# EAGLE board board comp 12-10-12 (EAGLE 6.3), part 1 of 2
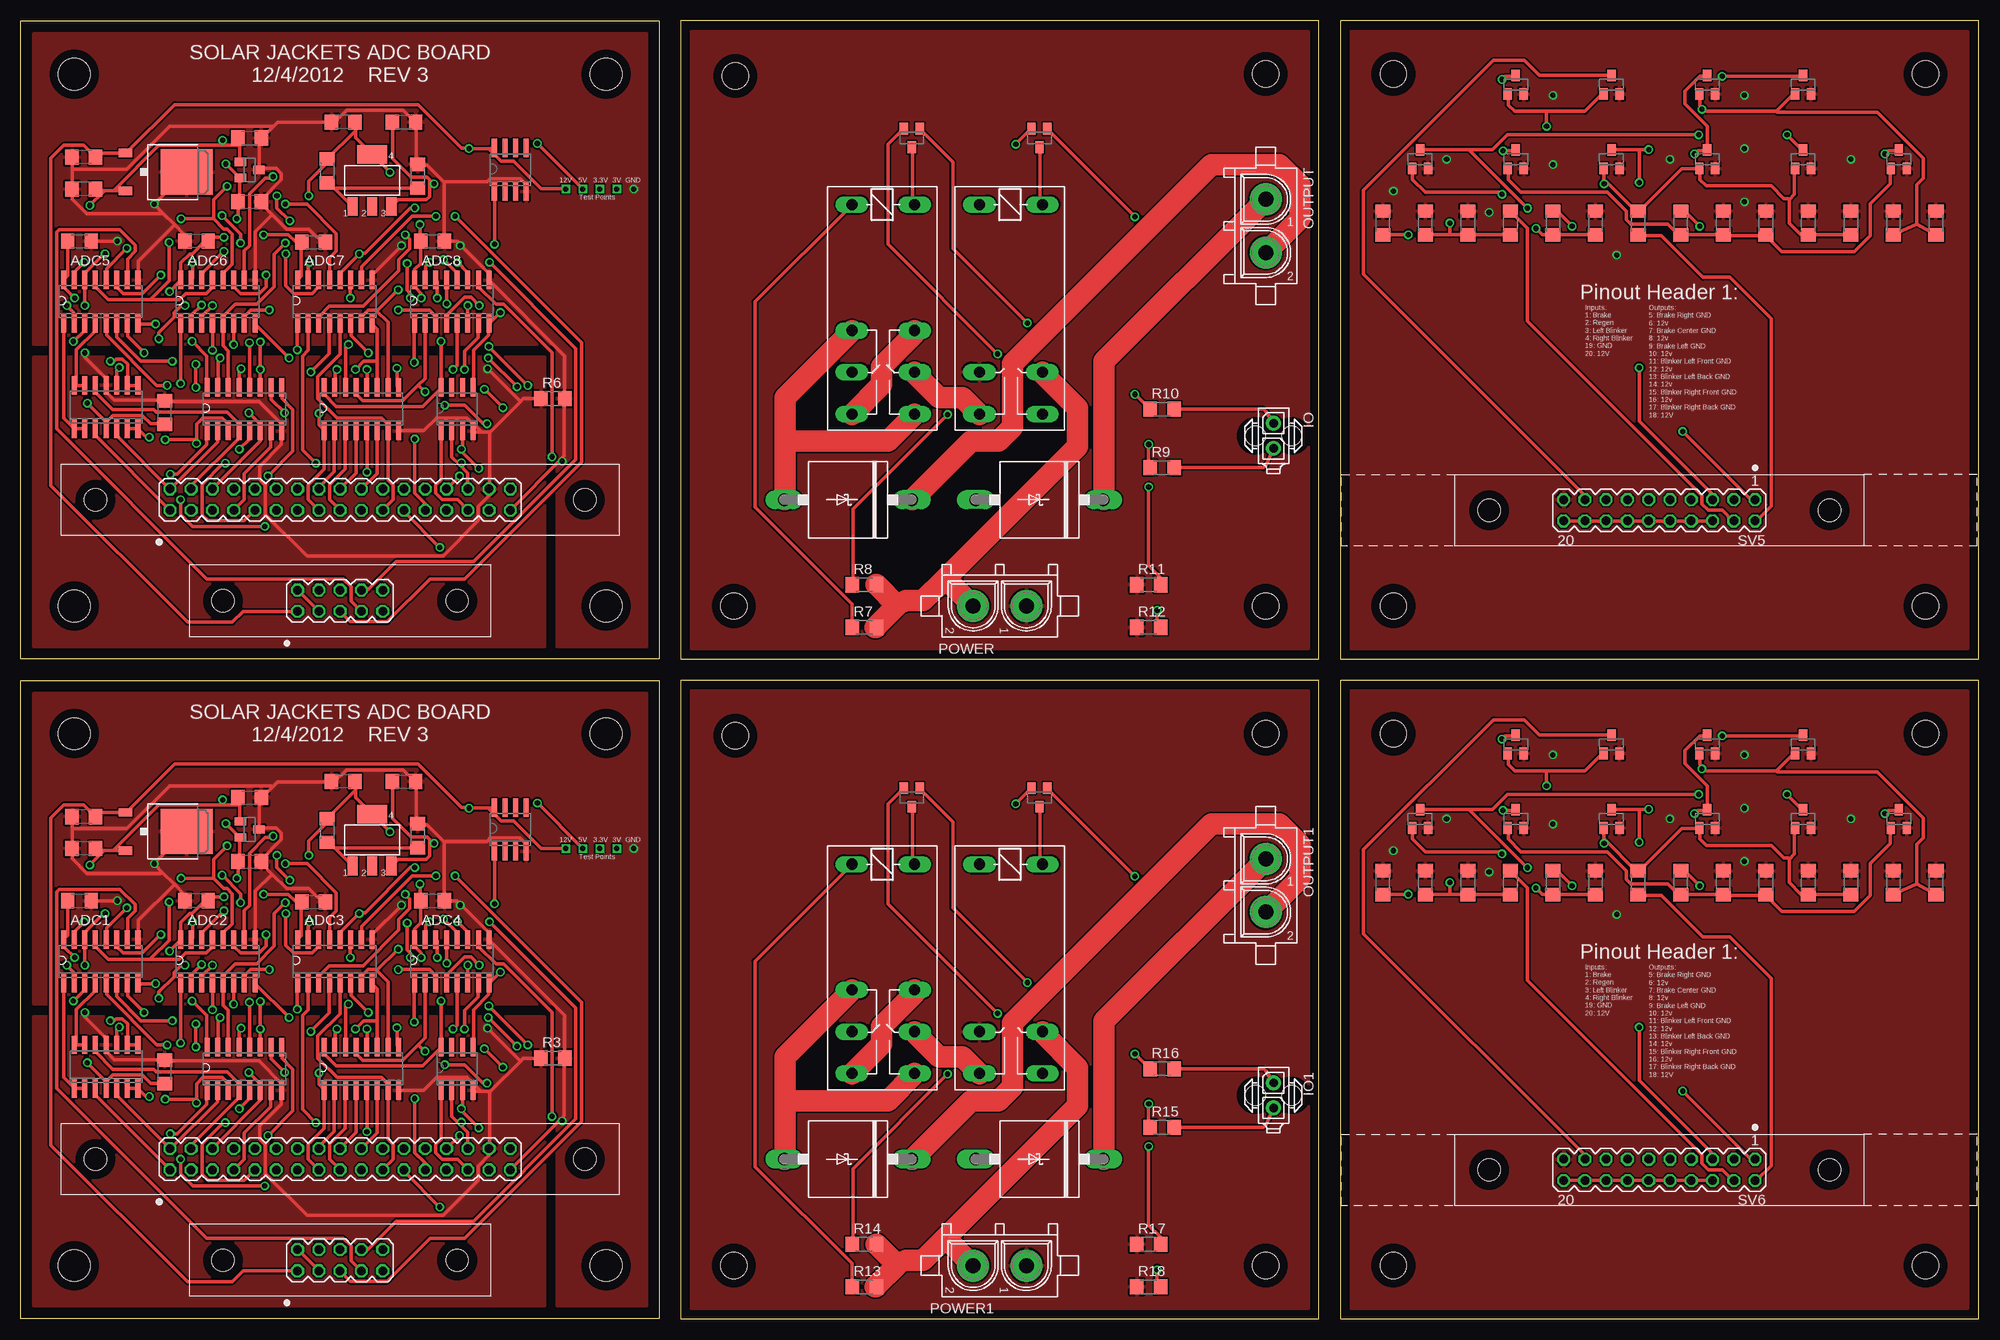
[diagram p0: board, top side]
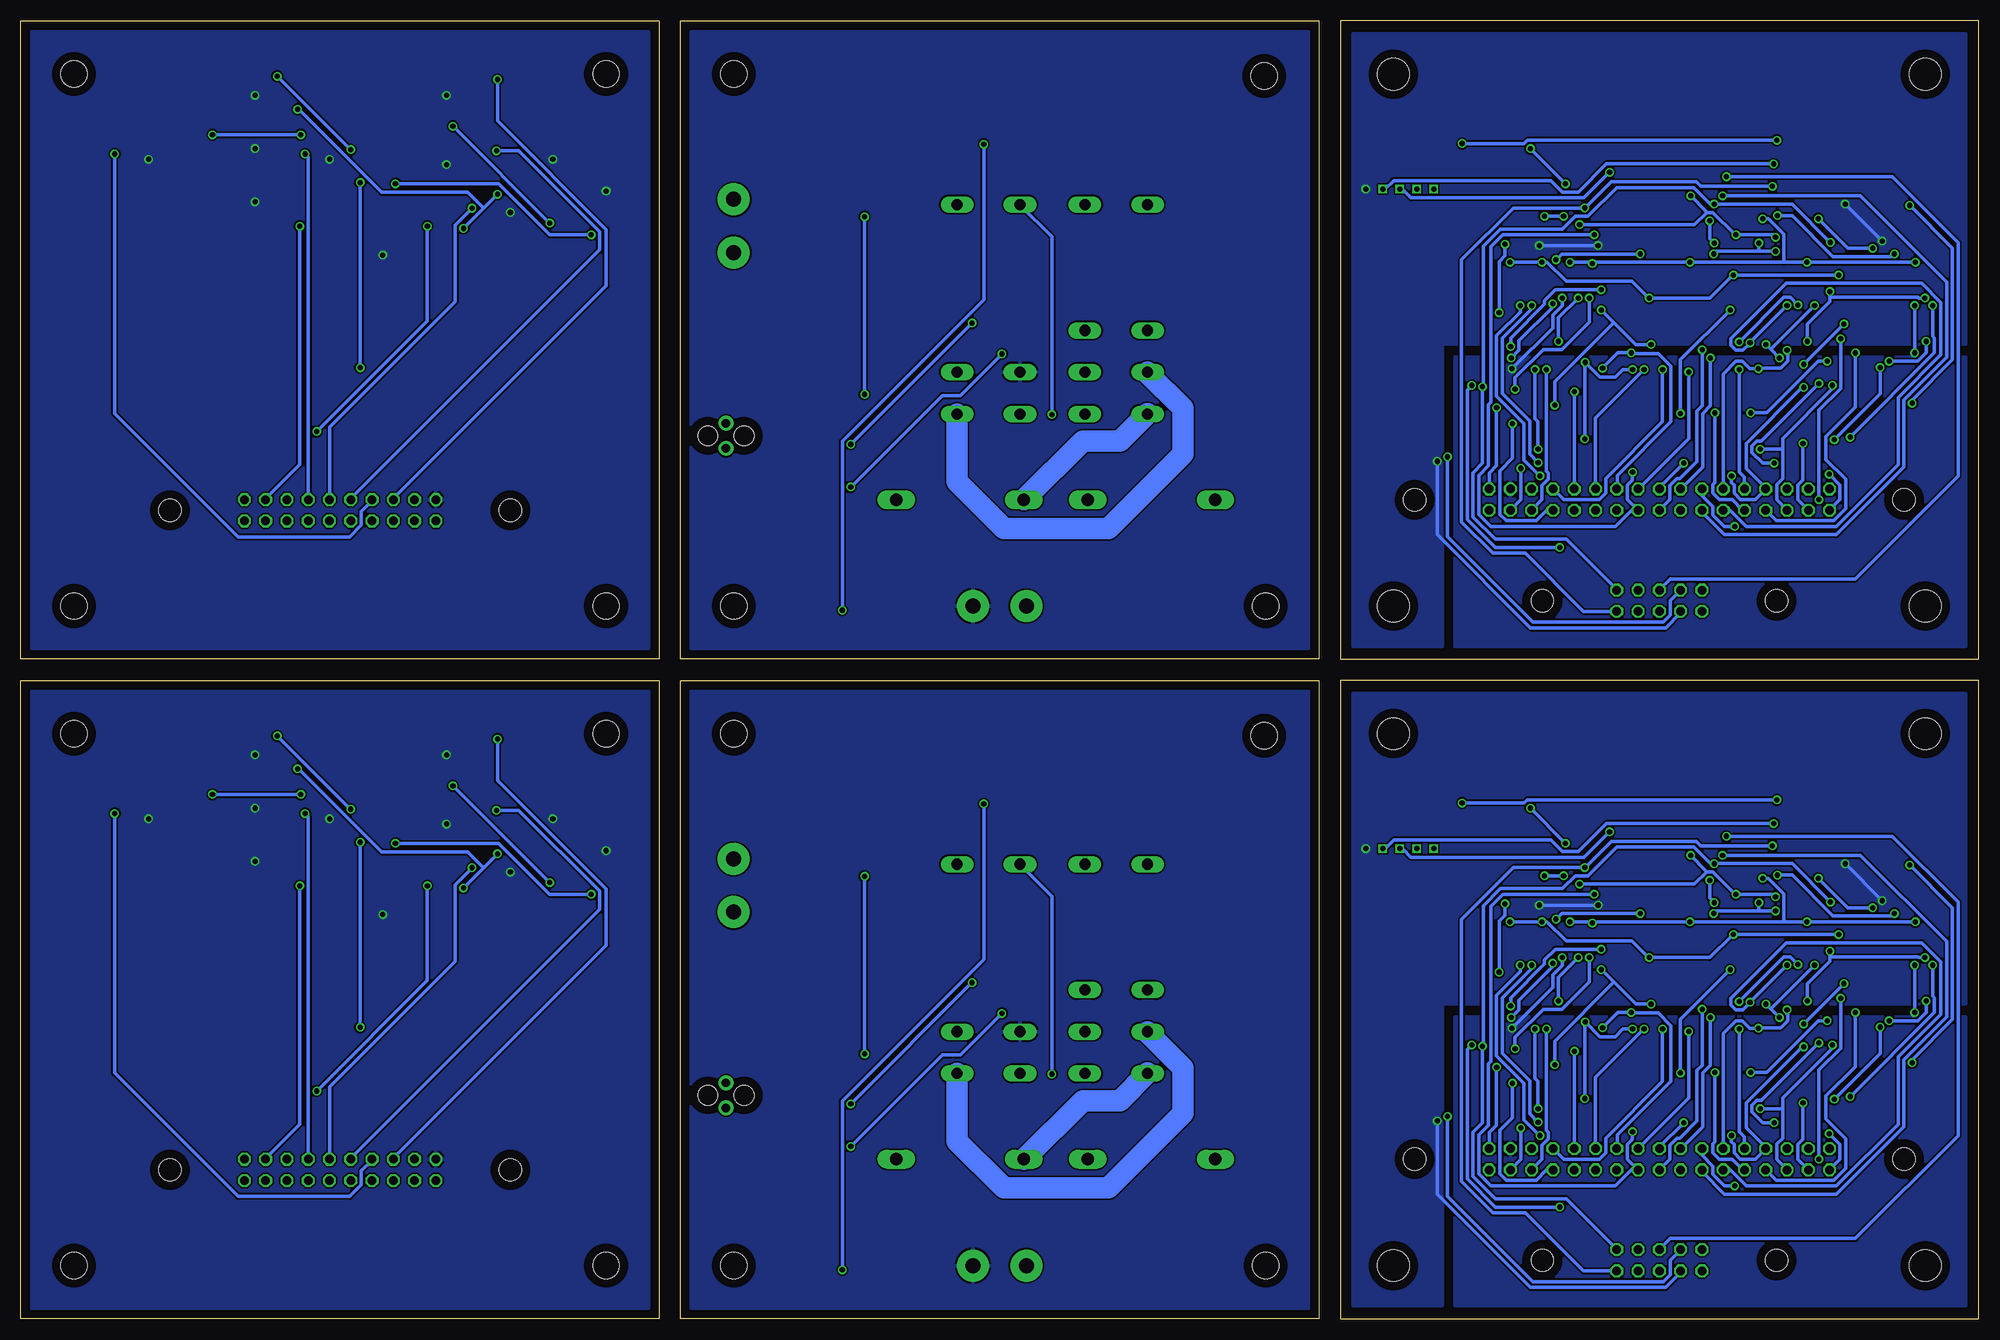
[diagram p1: board, bottom side, seen from below]

Size 233.68 x 154.94 mm. Coordinates in mm from the lower left corner, seen from the top.
Outline: 0,0 0,76.2 76.2,76.2 76.2,0 0,0
Outline: 0,78.74 0,154.94 76.2,154.94 76.2,78.74 0,78.74
Outline: 78.74,154.94 78.74,78.74 154.94,78.74 154.94,154.94 78.74,154.94
Outline: 78.74,76.2 78.74,0 154.94,0 154.94,76.2 78.74,76.2
Outline: 157.48,78.74 233.68,78.74 233.68,154.94 157.48,154.94 157.48,78.74
Outline: 157.48,0 233.68,0 233.68,76.2 157.48,76.2 157.48,0
Copper layers (1*16): Top 0.035mm / dielectric 1.5mm / Bottom 0.035mm
Design rules "default": minimum track width 10mil, minimum drill 24mil, track to track 8mil, track to pad 8mil, pad to pad 8mil, via to via 8mil, smd to smd 8mil, copper to edge 40mil, drill to drill 8mil, minimum pad ring 10mil, minimum via ring 8mil, stop-mask expansion 4mil, vias tented up to drill 0mil, thermal gap 10mil
Net classes: 1 power: width 2.54 mm, drill 76.2 mm
Holes 3.81 mm at 69.85,69.85 6.35,69.85 69.85,6.35 6.35,6.35 69.85,148.59 6.35,148.59 69.85,85.09 6.35,85.09
Holes 3.17 mm at 85.27,148.36 148.59,85.09 85.09,85.09 148.59,148.59 85.27,69.62 148.59,6.35 85.09,6.35 148.59,69.85 163.83,85.09 227.33,85.09 163.83,148.59 227.33,148.59 163.83,6.35 227.33,6.35 163.83,69.85 227.33,69.85

## Footprints (pad centres in the part's own frame; a part is rotated, then mirrored left to right if it is on the bottom)
SOT23 = smd 1 x 1.4: 1 -0.95,-1.1; 2 0.95,-1.1; 3 0,1.1
TO252 = smd 1 x 1.6: 1 -2.28,-4.8; 2 2.28,-4.8 | smd 5.4 x 6.2: 3 0,2.5
C1206 = smd 1.6 x 1.8: 1 -1.4,0; 2 1.4,0
SO16 = smd 0.6 x 2.2: 1 -4.445,-2.6; 2 -3.175,-2.6; 3 -1.905,-2.6; 4 -0.635,-2.6; 5 0.635,-2.6; 6 1.905,-2.6; 7 3.175,-2.6; 8 4.445,-2.6; 9 4.445,2.6; 10 3.175,2.6; 11 1.905,2.6; 12 0.635,2.6; 13 -0.635,2.6; 14 -1.905,2.6; 15 -3.175,2.6; 16 -4.445,2.6
P6T15 = drill 1.499 long: A 7.62,0; C -7.62,0
SOT223 = smd 1.219 x 2.235: 1 -2.311,-3.099; 2 0,-3.099; 3 2.311,-3.099 | smd 3.6 x 2.2: 4 0,3.099
794681-2 = drill 1 pad 1.778: 1 0,-1.5; 2 0,1.5 | hole 2.4: 2.13,0; -2.17,0
G2R2 = drill 1.321 long: 1 -2.54,-3.683; 2 -2.54,3.81; O1 12.471,3.81; O2 12.471,-3.683; P1 17.45,3.81; P2 17.45,-3.683; S1 22.454,3.81; S2 22.454,-3.683
G2R2A = drill 1.321 long: 1 -2.54,-3.683; 2 -2.54,3.81; P1 17.45,3.81; P2 17.45,-3.683; S1 22.454,3.81; S2 22.454,-3.683
SO14 = smd 0.6 x 2.2: 1 -3.81,-2.6; 2 -2.54,-2.6; 3 -1.27,-2.6; 4 0,-2.6; 5 1.27,-2.6; 6 2.54,-2.6; 7 3.81,-2.6; 8 3.81,2.6; 9 2.54,2.6; 10 1.27,2.6; 11 0,2.6; 12 -1.27,2.6; 13 -2.54,2.6; 14 -3.81,2.6
350428-1 = drill 1.8 pad 3.81: 1 -3.175,0; 2 3.175,0
R1206 = smd 1.6 x 1.803: 1 -1.422,0; 2 1.422,0
MA17-2 = drill 1.016 octagon: 1 -20.32,-1.27; 2 -20.32,1.27; 3 -17.78,-1.27; 4 -17.78,1.27; 5 -15.24,-1.27; 6 -15.24,1.27; 7 -12.7,-1.27; 8 -12.7,1.27; 9 -10.16,-1.27; 10 -10.16,1.27; 11 -7.62,-1.27; 12 -7.62,1.27; 13 -5.08,-1.27; 14 -5.08,1.27; 15 -2.54,-1.27; 16 -2.54,1.27; 17 0,-1.27; 18 0,1.27; 19 2.54,-1.27; 20 2.54,1.27; 21 5.08,-1.27; 22 5.08,1.27; 23 7.62,-1.27; 24 7.62,1.27; 25 10.16,-1.27; 26 10.16,1.27; 27 12.7,-1.27; 28 12.7,1.27; 29 15.24,-1.27; 30 15.24,1.27; 31 17.78,-1.27; 32 17.78,1.27; 33 20.32,-1.27; 34 20.32,1.27 | hole 2.692: -29.21,0; 29.21,0
MA05-2 = drill 1.016 octagon: 1 -5.08,-1.27; 2 -5.08,1.27; 3 -2.54,-1.27; 4 -2.54,1.27; 5 0,-1.27; 6 0,1.27; 7 2.54,-1.27; 8 2.54,1.27; 9 5.08,-1.27; 10 5.08,1.27 | hole 2.692: -13.97,0; 13.97,0
MA10-2 = drill 1.016 octagon: 1 -11.43,-1.27; 2 -11.43,1.27; 3 -8.89,-1.27; 4 -8.89,1.27; 5 -6.35,-1.27; 6 -6.35,1.27; 7 -3.81,-1.27; 8 -3.81,1.27; 9 -1.27,-1.27; 10 -1.27,1.27; 11 1.27,-1.27; 12 1.27,1.27; 13 3.81,-1.27; 14 3.81,1.27; 15 6.35,-1.27; 16 6.35,1.27; 17 8.89,-1.27; 18 8.89,1.27; 19 11.43,-1.27; 20 11.43,1.27 | hole 2.692: -20.32,0; 20.32,0
SO-08 = smd 0.6 x 2.2: 1 -1.905,-2.6; 2 -0.635,-2.6; 3 0.635,-2.6; 4 1.905,-2.6; 5 1.905,2.6; 6 0.635,2.6; 7 -0.635,2.6; 8 -1.905,2.6

## Placement (x,y rotation side)
3V  MAX6103  [SOT23]  27.3,58.42 270 top
3V1  MAX6103  [SOT23]  27.3,137.16 270 top
5V  LM7805TV  [TO252]  17.27,58.17 270 top
5V1  LM7805TV  [TO252]  17.27,136.91 270 top
317CAP1  .33uF  [C1206]  45.72,64.14 0 top
317CAP2  1uF  [C1206]  38.48,64.14 180 top
317CAP3  .33uF  [C1206]  45.72,142.88 0 top
317CAP4  1uF  [C1206]  38.48,142.88 180 top
6103CAP1  1uF  [C1206]  27.3,62.23 0 top
6103CAP2  1uF  [C1206]  27.3,54.61 0 top
6103CAP3  1uF  [C1206]  27.3,140.97 0 top
6103CAP4  1uF  [C1206]  27.3,133.35 0 top
6484CAP1  .1uF  [C1206]  17.14,29.46 90 top
6484CAP2  .1uF  [C1206]  17.14,108.2 90 top
7805CAP1  .33uF  [C1206]  7.49,59.94 180 top
7805CAP2  1uF  [C1206]  7.49,56.13 180 top
7805CAP3  1uF  [C1206]  7.49,134.87 180 top
7805CAP4  .33uF  [C1206]  7.49,138.68 180 top
ADC1  MCP-3008  [SO16]  9.53,42.67 0 top
ADC2  MCP-3008  [SO16]  23.5,42.67 0 top
ADC3  MCP-3008  [SO16]  37.47,42.67 0 top
ADC4  MCP-3008  [SO16]  51.44,42.67 0 top
ADC5  MCP-3008  [SO16]  9.53,121.41 0 top
ADC6  MCP-3008  [SO16]  23.5,121.41 0 top
ADC7  MCP-3008  [SO16]  37.47,121.41 0 top
ADC8  MCP-3008  [SO16]  51.44,121.41 0 top
ADC_CAP1  .1uF  [C1206]  6.99,49.91 0 top
ADC_CAP2  .1uF  [C1206]  20.95,49.91 180 top
ADC_CAP3  .1uF  [C1206]  34.92,49.78 0 top
ADC_CAP4  .1uF  [C1206]  49.15,49.91 0 top
ADC_CAP5  .1uF  [C1206]  6.99,128.65 0 top
ADC_CAP6  .1uF  [C1206]  20.95,128.65 180 top
ADC_CAP7  .1uF  [C1206]  34.92,128.52 0 top
ADC_CAP8  .1uF  [C1206]  49.15,128.65 0 top
BLINKER-L1  PMV56XN215  [SOT23]  178.44,138.43 0 top
BLINKER-L2  PMV56XN215  [SOT23]  224.16,138.43 0 top
BLINKER-L3  PMV56XN215  [SOT23]  178.44,59.69 0 top
BLINKER-L4  PMV56XN215  [SOT23]  224.16,59.69 0 top
BLINKER-R1  PMV56XN215  [SOT23]  178.44,147.32 0 top
BLINKER-R2  PMV56XN215  [SOT23]  189.87,147.32 0 top
BLINKER-R3  PMV56XN215  [SOT23]  178.44,68.58 0 top
BLINKER-R4  PMV56XN215  [SOT23]  189.87,68.58 0 top
BRAKE-C1  PMV56XN215  [SOT23]  201.29,147.32 0 top
BRAKE-C2  PMV56XN215  [SOT23]  201.29,138.43 0 top
BRAKE-C3  PMV56XN215  [SOT23]  201.29,59.69 0 top
BRAKE-C4  PMV56XN215  [SOT23]  201.29,68.58 0 top
BRAKE-L1  PMV56XN215  [SOT23]  167,138.43 0 top
BRAKE-L2  PMV56XN215  [SOT23]  212.72,138.43 0 top
BRAKE-L3  PMV56XN215  [SOT23]  212.72,59.69 0 top
BRAKE-L4  PMV56XN215  [SOT23]  167,59.69 0 top
BRAKE-R1  PMV56XN215  [SOT23]  212.72,147.32 0 top
BRAKE-R2  PMV56XN215  [SOT23]  189.87,138.43 0 top
BRAKE-R3  PMV56XN215  [SOT23]  212.72,68.58 0 top
BRAKE-R4  PMV56XN215  [SOT23]  189.87,59.69 0 top
D1  6A4  [P6T15]  121.58,97.79 180 top
D2  6A4  [P6T15]  98.72,97.79 180 top
D3  6A4  [P6T15]  121.58,19.05 180 top
D4  6A4  [P6T15]  98.72,19.05 180 top
IC1  LM317  [SOT223]  41.91,135.89 0 top
IC2  LM317  [SOT223]  41.91,57.15 0 top
IO  794681-2  [794681-2]  149.52,105.41 180 top
IO1  794681-2  [794681-2]  149.52,26.67 180 top
K1  G2R2  [G2R2]  102.87,130.47 270 top
K2  G2R2A  [G2R2A]  118.11,130.47 270 top
K3  G2R2  [G2R2]  102.87,51.73 270 top
K4  G2R2A  [G2R2A]  118.11,51.73 270 top
LMC6484_1  LMC6484  [SO14]  10.16,30.1 0 top
LMC6484_2  LMC6484  [SO14]  10.16,108.84 0 top
OUTPUT  350428-1  [350428-1]  148.59,130.47 270 top
OUTPUT1  350428-1  [350428-1]  148.59,51.73 270 top
POWER  350428-1  [350428-1]  116.84,85.09 180 top
POWER1  350428-1  [350428-1]  116.84,6.35 180 top
R1  220  [R1206]  36.58,58.29 270 top
R2  361  [R1206]  47.37,57.66 90 top
R3  0  [R1206]  63.5,31.11 0 top
R4  220  [R1206]  36.58,137.03 270 top
R5  361  [R1206]  47.37,136.4 90 top
R6  0  [R1206]  63.5,109.86 0 top
R7  1k  [R1206]  100.67,82.55 0 top
R8  1k  [R1206]  100.67,87.63 0 top
R9  1k  [R1206]  136.23,101.6 0 top
R10  1k  [R1206]  136.23,108.58 0 top
R11  0  [R1206]  134.62,87.63 0 top
R12  0  [R1206]  134.62,82.55 0 top
R13  1k  [R1206]  100.67,3.81 0 top
R14  1k  [R1206]  100.67,8.89 0 top
R15  1k  [R1206]  136.23,22.86 0 top
R16  1k  [R1206]  136.23,29.84 0 top
R17  0  [R1206]  134.62,8.89 0 top
R18  0  [R1206]  134.62,3.81 0 top
R19  1k  [R1206]  228.6,130.81 270 top
R20  1k  [R1206]  218.44,130.81 270 top
R21  1k  [R1206]  223.52,130.81 270 top
R22  1k  [R1206]  213.36,130.81 270 top
R23  1k  [R1206]  208.28,130.81 270 top
R24  1k  [R1206]  203.2,130.81 270 top
R25  1k  [R1206]  172.72,130.81 270 top
R26  1k  [R1206]  167.64,130.81 270 top
R27  1k  [R1206]  187.96,130.81 270 top
R28  1k  [R1206]  162.56,130.81 270 top
R29  1k  [R1206]  177.8,130.81 90 top
R30  1k  [R1206]  193.04,130.81 270 top
R31  1k  [R1206]  182.88,130.81 270 top
R32  1k  [R1206]  198.12,130.81 270 top
R33  1k  [R1206]  228.6,52.07 270 top
R34  1k  [R1206]  218.44,52.07 270 top
R35  1k  [R1206]  223.52,52.07 270 top
R36  1k  [R1206]  213.36,52.07 270 top
R37  1k  [R1206]  208.28,52.07 270 top
R38  1k  [R1206]  203.2,52.07 270 top
R39  1k  [R1206]  172.72,52.07 270 top
R40  1k  [R1206]  167.64,52.07 270 top
R41  1k  [R1206]  187.96,52.07 270 top
R42  1k  [R1206]  162.56,52.07 270 top
R43  1k  [R1206]  177.8,52.07 90 top
R44  1k  [R1206]  193.04,52.07 270 top
R45  1k  [R1206]  182.88,52.07 270 top
R46  1k  [R1206]  198.12,52.07 270 top
SV1  [MA17-2]  38.1,19.05 0 top
SV2  [MA05-2]  38.1,6.99 0 top
SV3  [MA17-2]  38.1,97.79 0 top
SV4  [MA05-2]  38.1,85.72 0 top
SV5  AMPLATCH-20  [MA10-2]  195.58,96.52 180 top
SV6  AMPLATCH-20  [MA10-2]  195.58,17.78 180 top
T1  PMV56XN  [SOT23]  106.34,140.97 180 top
T2  PMV56XN  [SOT23]  121.58,140.97 180 top
T3  PMV56XN  [SOT23]  106.34,62.23 180 top
T4  PMV56XN  [SOT23]  121.58,62.23 180 top
U$1  SP720APP  [SO16]  26.67,108.58 0 top
U$2  LM35  [SO-08]  58.42,58.42 0 top
U$3  SP720APP  [SO16]  40.64,108.58 0 top
U$4  SP721APP  [SO-08]  52.07,108.58 0 top
U$5  LM35  [SO-08]  58.42,137.16 0 top
U$6  SP720APP  [SO16]  26.67,29.84 0 top
U$7  SP720APP  [SO16]  40.64,29.84 0 top
U$8  SP721APP  [SO-08]  52.07,29.84 0 top

## Library data of the parts
3V 3V1 ADC1-ADC8 LMC6484_1 LMC6484_2 U$1-U$8 = SolarJacketsADC
5V 5V1 IC1 IC2 = linear
317CAP1-317CAP4 6103CAP1-6103CAP4 6484CAP1 6484CAP2 7805CAP1-7805CAP4 ADC_CAP1-ADC_CAP8 R1-R6 = rcl
BLINKER-L1-BLINKER-L4 BLINKER-R1-BLINKER-R4 BRAKE-C1-BRAKE-C4 BRAKE-L1-BRAKE-L4 BRAKE-R1-BRAKE-R4 T1-T4 = SolarJacketsADC; PART_NUM: PMV56XN,215
D1-D4 = diode
IO IO1 = con-amp; DIR: DIR; ON: ON
K1 K3 = relay; MF: OMRON COMPONENTS USA; MPN: G2R-2-DC6; OC_FARNELL: unknown; OC_NEWARK: 89C5317
K2 K4 = relay; MPN: G2R-2A-DC24; OC_FARNELL: 6985269; OC_NEWARK: 36M5257
OUTPUT OUTPUT1 = con-amp; NEG: -; POS: +
POWER POWER1 = con-amp; NEG: -; POS: +; VOLTAGE: 12V
R7-R10 R13-R16 R19-R46 = SolarJacketsADC; PART_NUM: CR1206-FX-1001GLF
R11 R12 R17 R18 = SolarJacketsADC; PART_NUM: CR1206-J/-000ELF
SV1-SV4 = SolarJacketsADC; OC_FARNELL: unknown; OC_NEWARK: unknown
SV5 SV6 = SolarJacketsADC; PART_NUM: 5499160-1

## Nets
3.3V: 317CAP2.1 ADC1.16 ADC2.16 ADC3.16 ADC4.16 ADC_CAP1.1 ADC_CAP2.1 ADC_CAP3.1 ADC_CAP4.1 IC2.4 R1.1 U$6.16 U$7.16 U$8.8
3.3V1: 317CAP4.1 ADC5.16 ADC6.16 ADC7.16 ADC8.16 ADC_CAP5.1 ADC_CAP6.1 ADC_CAP7.1 ADC_CAP8.1 IC1.4 R4.1 U$1.16 U$3.16 U$4.8
5V: 3V.1 5V.2 6103CAP1.1 6484CAP1.1 7805CAP2.1 LMC6484_1.4
5V1: 3V1.1 5V1.2 6103CAP3.1 6484CAP2.1 7805CAP3.1 LMC6484_2.4
12V: 5V.1 317CAP1.1 7805CAP1.1 IC2.3 SV2.1 U$2.8
12V1: 5V1.1 317CAP3.1 7805CAP4.1 IC1.3 SV4.1 U$5.8
12V2 [power]: K2.P1 POWER.2 R7.2 R8.2
12V3 [power]: K4.P1 POWER1.2 R13.2 R14.2
12V4: SV5.6 SV5.8 SV5.10 SV5.12 SV5.14 SV5.16 SV5.18 SV5.20
12V5: SV6.6 SV6.8 SV6.10 SV6.12 SV6.14 SV6.16 SV6.18 SV6.20
A1: ADC1.1 LMC6484_1.1 LMC6484_1.2
A2: ADC1.2 LMC6484_1.6 LMC6484_1.7
A3: ADC1.3 LMC6484_1.8 LMC6484_1.9
A4: ADC1.4 LMC6484_1.13 LMC6484_1.14
A5: ADC5.1 LMC6484_2.1 LMC6484_2.2
A6: ADC5.2 LMC6484_2.6 LMC6484_2.7
A7: ADC5.3 LMC6484_2.8 LMC6484_2.9
A8: ADC5.4 LMC6484_2.13 LMC6484_2.14
AGND: 6484CAP1.2 ADC1.14 ADC2.14 ADC3.14 ADC4.14 LMC6484_1.11 R3.1 SV1.32 U$6.8 U$7.8 U$8.4
AGND1: 6484CAP2.2 ADC5.14 ADC6.14 ADC7.14 ADC8.14 LMC6484_2.11 R6.1 SV3.32 U$1.8 U$3.8 U$4.4
BLINKER_L: BLINKER-L1.1 BLINKER-L2.1 R23.2 R24.2 R32.2
BLINKER_L1: BLINKER-L3.1 BLINKER-L4.1 R37.2 R38.2 R46.2
BLINKER_L_BACK_-: BLINKER-L2.3 SV5.13
BLINKER_L_BACK_-1: BLINKER-L4.3 SV6.13
BLINKER_L_FRONT_-: BLINKER-L1.3 SV5.11
BLINKER_L_FRONT_-1: BLINKER-L3.3 SV6.11
BLINKER_R: BLINKER-R1.1 BLINKER-R2.1 R25.2 R26.2 R29.1
BLINKER_R1: BLINKER-R3.1 BLINKER-R4.1 R39.2 R40.2 R43.1
BLINKER_R_BACK_-: BLINKER-R2.3 SV5.17
BLINKER_R_BACK_-1: BLINKER-R4.3 SV6.17
BLINKER_R_FRONT_-: BLINKER-R1.3 SV5.15
BLINKER_R_FRONT_-1: BLINKER-R3.3 SV6.15
BRAKE: BRAKE-C1.1 BRAKE-L1.1 BRAKE-R1.1 R19.2 R21.2 R27.2 R31.2
BRAKE1: BRAKE-C4.1 BRAKE-L4.1 BRAKE-R3.1 R33.2 R35.2 R41.2 R45.2
BRAKE_C_-: BRAKE-C1.3 BRAKE-C2.3 SV5.7
BRAKE_C_-1: BRAKE-C3.3 BRAKE-C4.3 SV6.7
BRAKE_L_-: BRAKE-L1.3 BRAKE-L2.3 SV5.9
BRAKE_L_-1: BRAKE-L3.3 BRAKE-L4.3 SV6.9
BRAKE_R_-: BRAKE-R1.3 BRAKE-R2.3 SV5.5
BRAKE_R_-1: BRAKE-R3.3 BRAKE-R4.3 SV6.5
BRAKE_REGEN: BRAKE-C2.1 BRAKE-L2.1 BRAKE-R2.1 R20.2 R22.2 R28.2 R30.1
BRAKE_REGEN1: BRAKE-C3.1 BRAKE-L3.1 BRAKE-R4.1 R34.2 R36.2 R42.2 R44.1
DIR: IO.2 R9.2
DIR1: IO1.2 R15.2
GND: 3V.3 5V.3 317CAP1.2 317CAP2.2 6103CAP1.2 6103CAP2.2 7805CAP1.2 7805CAP2.2 ADC1.9 ADC2.9 ADC3.9 ADC4.9 ADC_CAP1.2 ADC_CAP2.2 ADC_CAP3.2 ADC_CAP4.2 R2.2 R3.2 SV1.33 SV2.2 SV2.3 U$2.4
GND1: 3V1.3 5V1.3 317CAP3.2 317CAP4.2 6103CAP3.2 6103CAP4.2 7805CAP3.2 7805CAP4.2 ADC5.9 ADC6.9 ADC7.9 ADC8.9 ADC_CAP5.2 ADC_CAP6.2 ADC_CAP7.2 ADC_CAP8.2 R5.2 R6.2 SV3.33 SV4.2 SV4.3 U$5.4
GND2 [power]: K2.P2 POWER.1 R11.1 R12.1
GND3 [power]: K4.P2 POWER1.1 R17.1 R18.1
GND4: BLINKER-L1.2 BLINKER-L2.2 BLINKER-R1.2 BLINKER-R2.2 BRAKE-C1.2 BRAKE-C2.2 BRAKE-L1.2 BRAKE-L2.2 BRAKE-R1.2 BRAKE-R2.2 R19.1 R20.1 R21.1 R22.1 R23.1 R24.1 R25.1 R26.1 R27.1 R28.1 SV5.19
GND5: BLINKER-L3.2 BLINKER-L4.2 BLINKER-R3.2 BLINKER-R4.2 BRAKE-C3.2 BRAKE-C4.2 BRAKE-L3.2 BRAKE-L4.2 BRAKE-R3.2 BRAKE-R4.2 R33.1 R34.1 R35.1 R36.1 R37.1 R38.1 R39.1 R40.1 R41.1 R42.1 SV6.19
IN1: LMC6484_1.3 SV1.1 U$6.1
IN2: LMC6484_1.5 SV1.2 U$6.2
IN3: LMC6484_1.10 SV1.3 U$6.3
IN4: LMC6484_1.12 SV1.4 U$6.4
IN5: ADC1.5 SV1.5 U$6.5
IN6: ADC1.6 SV1.6 U$6.6
IN7: ADC1.7 SV1.7 U$6.7
IN8: ADC1.8 SV1.8 U$6.9
IN9: ADC2.1 SV1.9 U$6.10
IN10: ADC2.2 SV1.10 U$6.11
IN11: ADC2.3 SV1.11 U$6.12
IN12: ADC2.4 SV1.12 U$6.13
IN13: ADC2.5 SV1.13 U$6.14
IN14: ADC2.6 SV1.14 U$6.15
IN15: ADC2.7 SV1.15 U$7.1
IN16: ADC2.8 SV1.16 U$7.2
IN17: ADC3.1 SV1.17 U$7.3
IN18: ADC3.2 SV1.18 U$7.4
IN19: ADC3.3 SV1.19 U$7.5
IN20: ADC3.4 SV1.20 U$7.6
IN21: ADC3.5 SV1.21 U$7.7
IN22: ADC3.6 SV1.22 U$7.9
IN23: ADC3.7 SV1.23 U$7.10
IN24: ADC3.8 SV1.24 U$7.11
IN25: ADC4.1 SV1.25 U$7.12
IN26: ADC4.2 SV1.26 U$7.13
IN27: ADC4.3 SV1.27 U$7.14
IN28: ADC4.4 SV1.28 U$7.15
IN29: ADC4.5 SV1.29 U$8.1
IN30: ADC4.6 SV1.30 U$8.2
IN31: ADC4.7 SV1.31 U$8.3
IN32: ADC4.8 U$2.1 U$8.5
IN33: LMC6484_2.3 SV3.1 U$1.1
IN34: LMC6484_2.5 SV3.2 U$1.2
IN35: LMC6484_2.10 SV3.3 U$1.3
IN36: LMC6484_2.12 SV3.4 U$1.4
IN37: ADC5.8 SV3.8 U$1.9
IN38: ADC5.7 SV3.7 U$1.7
IN39: ADC5.6 SV3.6 U$1.6
IN40: ADC5.5 SV3.5 U$1.5
IN41: ADC6.2 SV3.10 U$1.11
IN42: ADC6.1 SV3.9 U$1.10
IN43: ADC6.5 SV3.13 U$1.14
IN44: ADC6.6 SV3.14 U$1.15
IN45: ADC7.8 SV3.24 U$3.11
IN46: ADC7.7 SV3.23 U$3.10
IN47: ADC7.5 SV3.21 U$3.7
IN48: ADC7.6 SV3.22 U$3.9
IN49: ADC7.4 SV3.20 U$3.6
IN50: ADC7.3 SV3.19 U$3.5
IN51: ADC7.1 SV3.17 U$3.3
IN52: ADC7.2 SV3.18 U$3.4
IN53: ADC8.1 SV3.25 U$3.12
IN54: ADC8.2 SV3.26 U$3.13
IN55: ADC8.4 SV3.28 U$3.15
IN56: ADC8.3 SV3.27 U$3.14
IN57: ADC8.8 U$4.5 U$5.1
IN58: ADC8.7 SV3.31 U$4.3
IN59: ADC8.5 SV3.29 U$4.1
IN60: ADC8.6 SV3.30 U$4.2
IN61: ADC6.8 SV3.16 U$3.2
IN62: ADC6.7 SV3.15 U$3.1
IN63: ADC6.3 SV3.11 U$1.12
IN64: ADC6.4 SV3.12 U$1.13
MOTOR+ [power]: D2.C OUTPUT.2
MOTOR+1 [power]: D4.C OUTPUT1.2
MOTOR+_PRE [power]: D2.A K1.O2 K1.S1
MOTOR+_PRE1 [power]: D4.A K3.O2 K3.S1
MOTOR- [power]: D1.C OUTPUT.1
MOTOR-1 [power]: D3.C OUTPUT1.1
MOTOR-_PRE [power]: D1.A K1.O1 K1.S2
MOTOR-_PRE1 [power]: D3.A K3.O1 K3.S2
N$1: IC2.1 R1.2 R2.1
N$2: IC1.1 R4.2 R5.1
N$3 [power]: K1.P2 K2.S1
N$4 [power]: K1.P1 K2.S2
N$5: K1.1 R7.1
N$6: K2.1 R8.1
N$7: K1.2 T1.3
N$8: K2.2 T2.3
N$9: R10.1 T2.1
N$10: R9.1 T1.1
N$11: R11.2 T1.2
N$12: R12.2 T2.2
N$13 [power]: K3.P2 K4.S1
N$14 [power]: K3.P1 K4.S2
N$15: K3.1 R13.1
N$16: K4.1 R14.1
N$17: K3.2 T3.3
N$18: K4.2 T4.3
N$19: R16.1 T4.1
N$20: R15.1 T3.1
N$21: R17.2 T3.2
N$22: R18.2 T4.2
N$23: R30.2 SV5.2
N$24: R29.2 SV5.4
N$25: R31.1 SV5.1
N$26: R32.1 SV5.3
N$27: R44.2 SV6.2
N$28: R43.2 SV6.4
N$29: R45.1 SV6.1
N$30: R46.1 SV6.3
ON: IO.1 R10.2
ON1: IO1.1 R16.2
SPI_CLK: ADC1.13 ADC2.13 ADC3.13 ADC4.13 SV2.10
SPI_CLK1: ADC5.13 ADC6.13 ADC7.13 ADC8.13 SV4.10
SPI_CS1: ADC1.10 SV2.7
SPI_CS2: ADC2.10 SV2.6
SPI_CS3: ADC3.10 SV2.5
SPI_CS4: ADC4.10 SV2.4
SPI_CS5: ADC5.10 SV4.7
SPI_CS6: ADC6.10 SV4.6
SPI_CS7: ADC8.10 SV4.4
SPI_CS8: ADC7.10 SV4.5
SPI_DIN: ADC1.11 ADC2.11 ADC3.11 ADC4.11 SV2.8
SPI_DIN1: ADC5.11 ADC6.11 ADC7.11 ADC8.11 SV4.8
SPI_DOUT: ADC1.12 ADC2.12 ADC3.12 ADC4.12 SV2.9
SPI_DOUT1: ADC5.12 ADC6.12 ADC7.12 ADC8.12 SV4.9
VREF: 3V.2 6103CAP2.1 ADC1.15 ADC2.15 ADC3.15 ADC4.15 SV1.34
VREF1: 3V1.2 6103CAP4.1 ADC5.15 ADC6.15 ADC7.15 ADC8.15 SV3.34

## Tracks (layer width: path | path; a pad name or v marks a point on that pad's centre or on a via)
3.3V  (via drill 0.61)
  Top 0.406: U$7.16 36.2,31.62 37.64,30.18 47.93,30.18 50.14,32.38 U$8.8 50.14,32.61 v50.14,37.95 | 39.93,62.94 39.93,62.26 41.91,60.27 IC2.4 42.06,60.12 v44.04,58.14 | 39.93,62.94 39.93,64.08 317CAP2.1 | 39.93,62.94 39.78,62.94 36.58,59.74 R1.1 36.5,59.51 36.5,59.21 34.37,57.07 v34.37,55.32 | ADC_CAP1.1 5.56,49.91 5.56,45.8 5.11,45.34 ADC1.16 5.18,45.11 5.18,44.35 v6.4,43.13 | ADC3.16 33.07,45.34 33.45,45.72 33.45,49.76 ADC_CAP3.1 33.3,49.84 32.77,49.84 31.93,50.67 v28.96,50.67 | v20.42,37.95 22.17,36.2 22.17,32.46 U$6.16 | v17.75,43.89 18.97,45.11 ADC2.16 19.05,47.32 20.12,48.39 20.42,48.39 21.95,49.91 ADC_CAP2.1 22.55,49.99 22.94,50.37 v24.23,50.37 | v47.62,51.89 47.62,50.06 ADC_CAP4.1 47.7,49.91 47.7,47.24 47.02,46.56 47.02,45.34 ADC4.16 47.09,45.11 47.09,44.35 47.78,43.66 v47.78,43.13
  Bottom 0.406: v20.42,37.95 20.42,40.01 17.75,42.67 17.75,43.2 | v17.75,43.89 17.75,43.2 | v24.23,50.37 24.54,50.67 v28.96,50.67 29.11,50.75 31.7,53.34 32.46,53.34 | v6.4,43.13 7.16,43.13 7.24,43.2 17.75,43.2 | v47.62,51.89 33.91,51.89 32.46,53.34 | v34.37,55.32 32.54,53.49 32.46,53.34 | v50.14,37.95 50.14,40.77 v47.78,43.13 | v44.04,58.14 47.09,55.09 67.74,55.09 68.73,56.08 69.04,56.08 v69.09,56.13
3.3V1  (via drill 0.61)
  Top 0.406: U$3.16 36.2,110.36 37.64,108.92 47.93,108.92 50.14,111.12 U$4.8 50.14,111.35 v50.14,116.69 | 39.93,141.68 39.93,141 41.91,139.01 IC1.4 42.06,138.86 v44.04,136.88 | 39.93,141.68 39.93,142.82 317CAP4.1 | 39.93,141.68 39.78,141.68 36.58,138.48 R4.1 36.5,138.25 36.5,137.95 34.37,135.81 v34.37,134.06 | ADC_CAP5.1 5.56,128.65 5.56,124.54 5.11,124.08 ADC5.16 5.18,123.85 5.18,123.09 v6.4,121.87 | ADC7.16 33.07,124.08 33.45,124.46 33.45,128.5 ADC_CAP7.1 33.3,128.57 32.77,128.57 31.93,129.41 v28.96,129.41 | v20.42,116.69 22.17,114.94 22.17,111.2 U$1.16 | v17.75,122.63 18.97,123.85 ADC6.16 19.05,126.06 20.12,127.13 20.42,127.13 21.95,128.65 ADC_CAP6.1 22.55,128.73 22.94,129.11 v24.23,129.11 | v47.62,130.63 47.62,128.8 ADC_CAP8.1 47.7,128.65 47.7,125.98 47.02,125.3 47.02,124.08 ADC8.16 47.09,123.85 47.09,123.09 47.78,122.4 v47.78,121.87
  Bottom 0.406: v20.42,116.69 20.42,118.75 17.75,121.41 17.75,121.94 | v17.75,122.63 17.75,121.94 | v24.23,129.11 24.54,129.41 v28.96,129.41 29.11,129.49 31.7,132.08 32.46,132.08 | v6.4,121.87 7.16,121.87 7.24,121.94 17.75,121.94 | v47.62,130.63 33.91,130.63 32.46,132.08 | v34.37,134.06 32.54,132.23 32.46,132.08 | v50.14,116.69 50.14,119.51 v47.78,121.87 | v44.04,136.88 47.09,133.83 67.74,133.83 68.73,134.82 69.04,134.82 v69.09,134.87
5V  (via drill 0.61)
  Top 0.406: 6484CAP1.1 17.14,28.12 15.47,28.12 14.48,29.11 10.97,29.11 10.21,28.35 10.21,27.51 LMC6484_1.4 10.06,28.42 v7.92,30.56 | 3V.1 26.14,59.44 26.14,61.95 25.91,62.18 6103CAP1.1 25.98,61.34 24.08,61.34 | 9.83,55.93 9.07,55.93 8.91,56.08 7805CAP2.1 | 9.83,55.93 11.2,55.93 | 11.2,55.93 12.42,55.93 5V.2 | 24.08,61.34 16.46,61.34 11.2,56.08 11.2,55.93 | v8.23,54.18 9.83,55.78 9.83,55.93 | v61.65,61.57 67.06,56.16 v67.06,56.13 | 24.08,61.34 v24.08,61.95
  Bottom 0.406: v7.92,30.56 7.92,30.94 3.12,35.74 3.12,49.07 v8.23,54.18 | v61.65,61.57 54.25,61.57 53.87,61.95 v24.08,61.95
5V1  (via drill 0.61)
  Top 0.406: 6484CAP2.1 17.14,106.86 15.47,106.86 14.48,107.85 10.97,107.85 10.21,107.09 10.21,106.25 LMC6484_2.4 10.06,107.16 v7.92,109.3 | 3V1.1 26.14,138.18 26.14,140.69 25.91,140.92 6103CAP3.1 25.98,140.08 24.08,140.08 | 9.83,134.67 9.07,134.67 8.91,134.82 7805CAP3.1 | 9.83,134.67 11.2,134.67 | 11.2,134.67 12.42,134.67 5V1.2 | 24.08,140.08 16.46,140.08 11.2,134.82 11.2,134.67 | v8.23,132.92 9.83,134.52 9.83,134.67 | v61.65,140.31 67.06,134.9 v67.06,134.87 | 24.08,140.08 v24.08,140.69
  Bottom 0.406: v7.92,109.3 7.92,109.68 3.12,114.48 3.12,127.81 v8.23,132.92 | v61.65,140.31 54.25,140.31 53.87,140.69 v24.08,140.69
12V  (via drill 0.61)
  Top 0.406: 48.77,56.77 48.77,55.24 48.39,54.86 45.03,54.86 IC2.3 | 48.77,56.77 48.77,57.23 48.46,57.53 46.56,57.53 44.35,59.74 44.35,64.08 317CAP1.1 | 55.93,60.96 v53.49,60.96 53.34,61.04 52.58,61.04 47.4,66.22 18.36,66.22 12.65,60.5 5V.1 12.42,60.43 9.37,60.43 8.91,59.97 7805CAP1.1 8.76,60.05 7.47,61.34 5.11,61.34 3.58,59.82 3.58,20.73 19.89,4.42 25.22,4.42 26.52,5.71 SV2.1 | 55.93,60.96 56.46,60.96 U$2.8 | 48.77,56.77 v49.3,56.77 | v65.02,56.13 65,56.16 62.1,56.16 58.83,59.44 57.3,59.44 55.93,60.81 55.93,60.96
  Bottom 0.406: v49.3,56.77 v53.49,60.96
12V1  (via drill 0.61)
  Top 0.406: 48.77,135.51 48.77,133.99 48.39,133.6 45.03,133.6 IC1.3 | 48.77,135.51 48.77,135.97 48.46,136.27 46.56,136.27 44.35,138.48 44.35,142.82 317CAP3.1 | 55.93,139.7 v53.49,139.7 53.34,139.78 52.58,139.78 47.4,144.96 18.36,144.96 12.65,139.24 5V1.1 12.42,139.17 9.37,139.17 8.91,138.71 7805CAP4.1 8.76,138.79 7.47,140.08 5.11,140.08 3.58,138.56 3.58,99.47 19.89,83.16 25.22,83.16 26.52,84.45 SV4.1 | 55.93,139.7 56.46,139.7 U$5.8 | 48.77,135.51 v49.3,135.51 | v65.02,134.87 65,134.9 62.1,134.9 58.83,138.18 57.3,138.18 55.93,139.55 55.93,139.7
  Bottom 0.406: v49.3,135.51 v53.49,139.7
12V2
  Top 2.54: 104.52,85.22 102.11,87.63 R8.2 | 104.52,85.22 104.52,85.09 101.98,82.55 R7.2 | 110.36,88.39 107.7,85.72 105.66,85.72 104.52,85.22 | 110.36,88.39 126.11,104.14 126.11,108.71 121.92,112.9 K2.P1 | 110.36,88.39 POWER.2
12V3
  Top 2.54: 104.52,6.48 102.11,8.89 R14.2 | 104.52,6.48 104.52,6.35 101.98,3.81 R13.2 | 110.36,9.65 107.7,6.99 105.66,6.99 104.52,6.48 | 110.36,9.65 126.11,25.4 126.11,29.97 121.92,34.16 K4.P1 | 110.36,9.65 POWER1.2
12V4
  Top 0.406: SV5.20 SV5.18 SV5.16 SV5.14 SV5.12 SV5.10 SV5.8 SV5.6
12V5
  Top 0.406: SV6.20 SV6.18 SV6.16 SV6.14 SV6.12 SV6.10 SV6.8 SV6.6
A1
  Top 0.406: LMC6484_1.2 6.4,27.51 LMC6484_1.1 6.25,27.66 5.11,28.8 5.11,40.01 ADC1.1
A2  (via drill 0.61)
  Top 0.406: LMC6484_1.6 12.72,27.51 13.95,27.51 LMC6484_1.7 14.1,27.36 14.94,26.52 v15.32,26.52 | v5.49,42.22 6.33,41.38 6.33,40.08 ADC1.2
  Bottom 0.406: v5.49,42.22 5.49,38.56 5.26,38.33 5.26,36.58 v15.32,26.52
A3  (via drill 0.61)
  Top 0.406: LMC6484_1.8 13.95,32.69 12.72,32.69 LMC6484_1.9 12.72,32.84 12.72,35.2 12.12,35.81 11.35,35.81 11.12,35.59 v10.67,35.59 | ADC1.3 7.62,39.24 6.33,37.95 v6.25,37.95
  Bottom 0.406: v6.25,37.95 6.25,36.58 7.24,35.59 v10.67,35.59
A4
  Top 0.406: LMC6484_1.13 6.4,32.69 LMC6484_1.14 6.63,32.84 6.63,36.96 8.84,39.17 8.84,40.01 ADC1.4
A5
  Top 0.406: LMC6484_2.2 6.4,106.25 LMC6484_2.1 6.25,106.4 5.11,107.54 5.11,118.75 ADC5.1
A6  (via drill 0.61)
  Top 0.406: LMC6484_2.6 12.72,106.25 13.95,106.25 LMC6484_2.7 14.1,106.1 14.94,105.26 v15.32,105.26 | v5.49,120.95 6.33,120.12 6.33,118.82 ADC5.2
  Bottom 0.406: v5.49,120.95 5.49,117.3 5.26,117.07 5.26,115.32 v15.32,105.26
A7  (via drill 0.61)
  Top 0.406: LMC6484_2.8 13.95,111.43 12.72,111.43 LMC6484_2.9 12.72,111.58 12.72,113.94 12.12,114.55 11.35,114.55 11.12,114.33 v10.67,114.33 | ADC5.3 7.62,117.98 6.33,116.69 v6.25,116.69
  Bottom 0.406: v6.25,116.69 6.25,115.32 7.24,114.33 v10.67,114.33
A8
  Top 0.406: LMC6484_2.13 6.4,111.43 LMC6484_2.14 6.63,111.58 6.63,115.7 8.84,117.91 8.84,118.75 ADC5.4
AGND  (via drill 0.61)
  Top 0.406: 56.01,27.13 59.63,30.75 | 59.63,30.75 59.97,31.09 62.03,31.09 R3.1 | 54.79,27.13 54.1,27.13 54.03,27.2 U$8.4 | 54.79,27.13 56.01,27.13 | U$7.8 45.11,27.28 48.08,27.28 49.61,28.8 53.26,28.8 54.79,27.28 54.79,27.13 | 56.01,27.13 55.93,26.98 55.93,20.34 SV1.32 55.85,20.12 55.85,19.51 54.56,18.21 54.56,16.54 50.37,12.34 34.14,12.34 29.18,17.3 29.18,20.8 28.5,21.49 28.5,23.01 31.09,25.6 31.09,27.05 U$6.8 31.09,27.28 31.09,28.12 28.42,30.79 17.3,30.79 6484CAP1.2 17.14,30.94 11.12,30.94 10.21,31.85 10.21,32.69 LMC6484_1.11 10.06,32.84 10.06,33.6 7.62,36.04 v7.62,36.58 | v55.7,34.67 59.63,30.75 | v49.68,43.13 49.68,45.11 ADC4.14 | v24.23,48.69 21.64,46.1 21.64,45.34 ADC2.14 | v31.62,48.39 31.62,44.58 32.54,43.66 34.75,43.66 35.51,44.42 35.51,45.26 ADC3.14 | v7.62,42.22 ADC1.14 7.7,45.41 7.7,46.18 9.91,48.39 v10.06,48.39 | v26.21,49.68 26.21,50.75 v24,52.96
  Bottom 0.406: v55.7,34.67 50.83,39.55 50.83,41.07 49.68,42.22 v49.68,43.13 | 26.21,48.69 31.32,48.69 v31.62,48.39 | 26.21,48.69 v24.23,48.69 | v7.62,36.58 v7.62,42.22 | v26.21,49.68 26.21,48.69 | v24,52.96 22.25,52.96 17.37,48.08 10.36,48.08 v10.06,48.39
  pour Bottom: 1.52,36.07 1.52,1.52 62.48,1.52 62.48,36.07
  pour Top: 1.52,36.07 1.52,1.52 62.48,1.52 62.48,36.07
AGND1  (via drill 0.61)
  Top 0.406: 56.01,105.87 59.63,109.49 | 59.63,109.49 59.97,109.83 62.03,109.83 R6.1 | 54.79,105.87 54.1,105.87 54.03,105.94 U$4.4 | 54.79,105.87 56.01,105.87 | U$3.8 45.11,106.02 48.08,106.02 49.61,107.54 53.26,107.54 54.79,106.02 54.79,105.87 | 56.01,105.87 55.93,105.72 55.93,99.08 SV3.32 55.85,98.86 55.85,98.25 54.56,96.95 54.56,95.28 50.37,91.08 34.14,91.08 29.18,96.04 29.18,99.54 28.5,100.23 28.5,101.75 31.09,104.34 31.09,105.79 U$1.8 31.09,106.02 31.09,106.86 28.42,109.53 17.3,109.53 6484CAP2.2 17.14,109.68 11.12,109.68 10.21,110.59 10.21,111.43 LMC6484_2.11 10.06,111.58 10.06,112.34 7.62,114.78 v7.62,115.32 | v55.7,113.41 59.63,109.49 | v49.68,121.87 49.68,123.85 ADC8.14 | v24.23,127.43 21.64,124.84 21.64,124.08 ADC6.14 | v31.62,127.13 31.62,123.32 32.54,122.4 34.75,122.4 35.51,123.17 35.51,124 ADC7.14 | v7.62,120.95 ADC5.14 7.7,124.16 7.7,124.92 9.91,127.13 v10.06,127.13 | v26.21,128.42 26.21,129.49 v24,131.7
  Bottom 0.406: v55.7,113.41 50.83,118.29 50.83,119.81 49.68,120.95 v49.68,121.87 | 26.21,127.43 31.32,127.43 v31.62,127.13 | 26.21,127.43 v24.23,127.43 | v7.62,115.32 v7.62,120.95 | v26.21,128.42 26.21,127.43 | v24,131.7 22.25,131.7 17.37,126.82 10.36,126.82 v10.06,127.13
  pour Bottom: 1.52,114.81 1.52,80.26 62.48,80.26 62.48,114.81
  pour Top: 1.52,114.81 1.52,80.26 62.48,80.26 62.48,114.81
BLINKER_L
  Top 0.406: BLINKER-L2.1 223.14,137.29 223.14,135.51 220.73,133.1 220.73,129.29 218.82,127.38 210.19,127.38 208.28,129.29 R23.2 208.15,129.29 203.33,129.29 R24.2 203.2,129.41 198.25,129.41 R32.2 198.12,129.41 197.87,129.41 196.6,130.68 192.15,130.68 191.64,131.19 191.64,132.21 189.36,134.49 179.07,134.49 177.55,136.02 177.55,137.29 BLINKER-L1.1
BLINKER_L1
  Top 0.406: BLINKER-L4.1 223.14,58.55 223.14,56.77 220.73,54.36 220.73,50.55 218.82,48.64 210.19,48.64 208.28,50.55 R37.2 208.15,50.55 203.33,50.55 R38.2 203.2,50.67 198.25,50.67 R46.2 198.12,50.67 197.87,50.67 196.6,51.94 192.15,51.94 191.64,52.45 191.64,53.47 189.36,55.75 179.07,55.75 177.55,57.28 177.55,58.55 BLINKER-L3.1
BLINKER_L_BACK_-  (via drill 0.61)
  Top 0.406: v222.5,139.06 222.88,139.45 224.16,139.45 BLINKER-L2.3
  Bottom 0.406: v222.5,139.06 222.5,108.08 207.77,93.34 194.44,93.34 193.04,94.74 193.04,96.39 191.77,97.66 SV5.13
BLINKER_L_BACK_-1  (via drill 0.61)
  Top 0.406: v222.5,60.33 222.88,60.71 224.16,60.71 BLINKER-L4.3
  Bottom 0.406: v222.5,60.33 222.5,29.34 207.77,14.61 194.44,14.61 193.04,16 193.04,17.65 191.77,18.92 SV6.13
BLINKER_L_FRONT_-  (via drill 0.61)
  Top 0.406: v176.91,139.45 178.44,139.45 BLINKER-L1.3
  Bottom 0.406: v176.91,139.45 174.24,139.45 164.59,129.79 164.59,127.64 194.31,97.92 SV5.11
BLINKER_L_FRONT_-1  (via drill 0.61)
  Top 0.406: v176.91,60.71 178.44,60.71 BLINKER-L3.3
  Bottom 0.406: v176.91,60.71 174.24,60.71 164.59,51.05 164.59,48.9 194.31,19.18 SV6.11
BLINKER_R  (via drill 0.61)
  Top 0.406: 170.56,129.41 172.72,129.41 R25.2 172.85,129.41 177.8,129.41 R29.1 | 170.56,129.41 167.64,129.41 R26.2 | 182.12,144.15 186.69,144.15 188.85,146.3 BLINKER-R2.1 | 182.12,144.15 178.31,144.15 177.55,144.91 177.55,146.18 BLINKER-R1.1 | v170.56,130.81 170.56,129.41 | 182.12,144.15 v182.12,142.37
  Bottom 0.406: v182.12,142.37 v170.56,130.81
BLINKER_R1  (via drill 0.61)
  Top 0.406: 170.56,50.67 172.72,50.67 R39.2 172.85,50.67 177.8,50.67 R43.1 | 170.56,50.67 167.64,50.67 R40.2 | 182.12,65.41 186.69,65.41 188.85,67.56 BLINKER-R4.1 | 182.12,65.41 178.31,65.41 177.55,66.17 177.55,67.44 BLINKER-R3.1 | v170.56,52.07 170.56,50.67 | 182.12,65.41 v182.12,63.63
  Bottom 0.406: v182.12,63.63 v170.56,52.07
BLINKER_R_BACK_-
  Top 0.406: SV5.17 186.69,98.3 160.27,124.71 160.27,134.75 175.77,150.24 179.45,150.24 181.23,148.46 189.87,148.46 BLINKER-R2.3
BLINKER_R_BACK_-1
  Top 0.406: SV6.17 186.69,19.56 160.27,45.97 160.27,56.01 175.77,71.5 179.45,71.5 181.23,69.72 189.87,69.72 BLINKER-R4.3
BLINKER_R_FRONT_-  (via drill 0.61)
  Top 0.406: v176.78,147.96 177.16,148.34 178.44,148.34 BLINKER-R1.3
  Bottom 0.406: v176.78,147.96 176.78,143 163.83,130.05 163.83,123.32 189.23,97.92 SV5.15
BLINKER_R_FRONT_-1  (via drill 0.61)
  Top 0.406: v176.78,69.22 177.16,69.6 178.44,69.6 BLINKER-R3.3
  Bottom 0.406: v176.78,69.22 176.78,64.26 163.83,51.31 163.83,44.58 189.23,19.18 SV6.15
BRAKE  (via drill 0.61)
  Top 0.406: v176.78,134.24 176.53,134.49 167.64,134.49 166.12,136.02 166.12,137.29 BRAKE-L1.1 | v180.85,130.18 181.61,129.41 182.88,129.41 R31.2 183.01,129.41 187.96,129.41 R27.2 | 226.31,130.68 228.6,129.41 R19.2 | 226.31,130.68 223.52,129.41 R21.2 | 200.79,144.53 201.17,144.15 209.55,144.15 | 200.79,144.53 200.41,144.91 200.41,146.18 BRAKE-C1.1 | 209.55,144.15 211.71,146.3 BRAKE-R1.1 | 226.31,130.68 226.31,135.38 227.08,136.14 227.08,138.56 221.62,144.02 209.68,144.02 209.55,144.15 | v200.66,144.4 200.79,144.53
  Bottom 0.406: v180.85,130.18 178.44,132.59 | 178.44,132.59 v176.78,134.24 | 178.44,132.59 180.34,134.49 190.63,134.49 200.53,144.4 v200.66,144.4
BRAKE1  (via drill 0.61)
  Top 0.406: v176.78,55.5 176.53,55.75 167.64,55.75 166.12,57.28 166.12,58.55 BRAKE-L4.1 | v180.85,51.44 181.61,50.67 182.88,50.67 R45.2 183.01,50.67 187.96,50.67 R41.2 | 226.31,51.94 228.6,50.67 R33.2 | 226.31,51.94 223.52,50.67 R35.2 | 200.79,65.79 201.17,65.41 209.55,65.41 | 200.79,65.79 200.41,66.17 200.41,67.44 BRAKE-C4.1 | 209.55,65.41 211.71,67.56 BRAKE-R3.1 | 226.31,51.94 226.31,56.64 227.08,57.4 227.08,59.82 221.62,65.28 209.68,65.28 209.55,65.41 | v200.66,65.66 200.79,65.79
  Bottom 0.406: v180.85,51.44 178.44,53.85 | 178.44,53.85 v176.78,55.5 | 178.44,53.85 180.34,55.75 190.63,55.75 200.53,65.66 v200.66,65.66
BRAKE_C_-  (via drill 0.61)
  Top 0.406: BRAKE-C1.3 201.29,148.34 200.41,148.34 198.63,146.56 198.63,145.03 201.29,142.37 BRAKE-C2.3 201.17,139.45 200.15,139.45 v199.77,139.06
  Bottom 0.406: SV5.7 199.39,138.68 v199.77,139.06
BRAKE_C_-1  (via drill 0.61)
  Top 0.406: BRAKE-C4.3 201.29,69.6 200.41,69.6 198.63,67.82 198.63,66.29 201.29,63.63 BRAKE-C3.3 201.17,60.71 200.15,60.71 v199.77,60.33
  Bottom 0.406: SV6.7 199.39,59.94 v199.77,60.33
BRAKE_L_-  (via drill 0.61)
  Top 0.406: 172.97,139.57 175.64,139.57 177.42,141.35 v200.28,141.35 | 172.97,139.57 167,139.57 BRAKE-L1.3 | v210.82,141.35 212.72,139.45 BRAKE-L2.3 | v179.83,132.59 172.97,139.45 172.97,139.57
  Bottom 0.406: v210.82,141.35 v200.28,141.35 | SV5.9 196.85,106.43 181.86,121.41 181.86,130.56 v179.83,132.59
BRAKE_L_-1  (via drill 0.61)
  Top 0.406: 172.97,60.83 175.64,60.83 177.42,62.61 v200.28,62.61 | 172.97,60.83 167,60.83 BRAKE-L4.3 | v210.82,62.61 212.72,60.71 BRAKE-L3.3 | v179.83,53.85 172.97,60.71 172.97,60.83
  Bottom 0.406: v210.82,62.61 v200.28,62.61 | SV6.9 196.85,27.69 181.86,42.67 181.86,51.82 v179.83,53.85
BRAKE_R_-  (via drill 0.61)
  Top 0.406: v194.31,139.57 193.17,139.57 | 193.17,139.57 189.87,139.57 BRAKE-R2.3 | v203.07,148.34 212.72,148.34 BRAKE-R1.3 | SV5.5 201.93,98.42 193.17,107.19 v193.17,113.54 | 193.17,139.57 v193.17,135.64
  Bottom 0.406: v203.07,148.34 v194.31,139.57 | v193.17,135.64 v193.17,113.54
BRAKE_R_-1  (via drill 0.61)
  Top 0.406: v194.31,60.83 193.17,60.83 | 193.17,60.83 189.87,60.83 BRAKE-R4.3 | v203.07,69.6 212.72,69.6 BRAKE-R3.3 | SV6.5 201.93,19.68 193.17,28.45 v193.17,34.8 | 193.17,60.83 v193.17,56.9
  Bottom 0.406: v203.07,69.6 v194.31,60.83 | v193.17,56.9 v193.17,34.8
BRAKE_REGEN  (via drill 0.61)
  Top 0.406: 211.07,133.6 211.71,134.24 211.71,137.29 BRAKE-L2.1 | 211.07,133.6 211.07,130.81 212.47,129.41 213.36,129.41 R22.2 213.49,129.41 218.44,129.41 R20.2 | 189.23,135.76 192.66,132.33 193.04,132.33 R30.1 193.17,132.21 198.25,137.29 200.28,137.29 BRAKE-C2.1 200.41,137.16 200.41,136.02 201.17,135.25 208.91,135.25 210.44,133.73 210.95,133.73 211.07,133.6 | 189.23,135.76 188.98,136.02 188.98,137.29 BRAKE-R2.1 | v165.61,129.41 162.56,129.41 R28.2 | v188.98,135.51 189.23,135.76
  Bottom 0.406: v165.61,129.41 170.56,129.41 176.66,135.51 v188.98,135.51
BRAKE_REGEN1  (via drill 0.61)
  Top 0.406: 211.07,54.86 211.71,55.5 211.71,58.55 BRAKE-L3.1 | 211.07,54.86 211.07,52.07 212.47,50.67 213.36,50.67 R36.2 213.49,50.67 218.44,50.67 R34.2 | 189.23,57.02 192.66,53.59 193.04,53.59 R44.1 193.17,53.47 198.25,58.55 200.28,58.55 BRAKE-C3.1 200.41,58.42 200.41,57.28 201.17,56.52 208.91,56.52 210.44,54.99 210.95,54.99 211.07,54.86 | 189.23,57.02 188.98,57.28 188.98,58.55 BRAKE-R4.1 | v165.61,50.67 162.56,50.67 R42.2 | v188.98,56.77 189.23,57.02
  Bottom 0.406: v165.61,50.67 170.56,50.67 176.66,56.77 v188.98,56.77
DIR
  Top 0.406: R9.2 148.34,101.6 148.59,101.85 IO.2
DIR1
  Top 0.406: R15.2 148.34,22.86 148.59,23.11 IO1.2
GND  (via drill 0.61)
  Top 0.406: SV2.2 33.07,8.23 35.59,5.71 SV2.3 | 64.43,23.81 58.45,17.83 SV1.33 | 64.43,23.81 64.85,24.23 64.85,31.09 R3.2 64.92,31.32 64.92,36.2 56.01,45.11 ADC4.9 55.85,45.34 55.85,46.1 52.5,49.45 | v64.62,23.62 64.43,23.81 | 6.1,58.52 6.1,59.89 7805CAP1.2 | 6.1,58.52 6.1,56.16 7805CAP2.2 6.1,55.93 6.1,54.94 7.85,53.19 16.76,53.19 16.88,53.3 | v11.51,49.91 ADC_CAP1.2 | 5V.3 19.74,58.14 v15.93,54.33 16,54.18 16.88,53.3 | 16.88,53.3 18.33,51.85 | 18.33,51.85 19.51,50.67 19.51,49.91 ADC_CAP2.2 | 18.33,51.85 14.02,47.55 14.02,45.34 ADC1.9 | 30.06,63.51 28.88,62.33 6103CAP1.2 28.65,62.18 28.42,61.95 28.42,58.45 3V.3 28.57,58.6 30.48,58.6 31.09,57.99 31.09,57.23 28.65,54.79 6103CAP2.2 28.73,54.56 28.73,54.33 29.98,53.07 | 30.06,63.51 30.63,64.08 37.03,64.08 317CAP2.2 37.26,64.24 37.57,64.24 38.86,65.53 45.64,65.53 46.94,64.24 317CAP1.2 47.17,64.08 47.17,59.28 47.32,59.13 R2.2 47.55,58.98 48.46,58.98 50.52,56.92 | 29.98,53.07 31.7,51.36 34.37,51.36 35.89,49.84 36.27,49.84 ADC_CAP3.2 | 29.98,53.07 27.96,51.05 27.96,45.34 ADC2.9 | 52.5,49.45 52.05,49.91 ADC_CAP4.2 50.52,50.06 50.52,56.92 | ADC3.9 41.91,45.87 v45.41,49.38 | v52.43,49.38 52.5,49.45 | 6.1,58.52 12.65,58.52 17.75,63.63 29.95,63.63 30.06,63.51 | 50.52,56.92 50.67,57 55.63,57 56.01,57.38 59.59,57.38 60.27,56.69 60.27,55.85 U$2.4
  Bottom 0.406: v64.62,23.62 64.62,14.86 53.49,3.73 37.34,3.73 35.59,5.49 35.59,5.71 SV2.3 | v15.93,54.33 v11.51,49.91 | v52.43,49.38 v45.41,49.38
  other vias: 73.15,56.13
  pour Bottom: 1.52,37.59 1.52,74.68 74.68,74.68 74.68,1.52 64.01,1.52 64.01,37.59
  pour Top: 1.52,37.59 1.52,74.68 74.68,74.68 74.68,1.52 64.01,1.52 64.01,37.59
GND1  (via drill 0.61)
  Top 0.406: SV4.2 33.07,86.97 35.59,84.45 SV4.3 | 64.43,102.55 58.45,96.57 SV3.33 | 64.43,102.55 64.85,102.97 64.85,109.83 R6.2 64.92,110.06 64.92,114.94 56.01,123.85 ADC8.9 55.85,124.08 55.85,124.84 52.5,128.19 | v64.62,102.36 64.43,102.55 | 6.1,137.26 6.1,138.63 7805CAP4.2 | 6.1,137.26 6.1,134.9 7805CAP3.2 6.1,134.67 6.1,133.68 7.85,131.93 16.76,131.93 16.88,132.04 | v11.51,128.65 ADC_CAP5.2 | 5V1.3 19.74,136.88 v15.93,133.07 16,132.92 16.88,132.04 | 16.88,132.04 18.33,130.59 | 18.33,130.59 19.51,129.41 19.51,128.65 ADC_CAP6.2 | 18.33,130.59 14.02,126.29 14.02,124.08 ADC5.9 | 30.06,142.25 28.88,141.07 6103CAP3.2 28.65,140.92 28.42,140.69 28.42,137.19 3V1.3 28.57,137.34 30.48,137.34 31.09,136.73 31.09,135.97 28.65,133.53 6103CAP4.2 28.73,133.3 28.73,133.07 29.98,131.81 | 30.06,142.25 30.63,142.82 37.03,142.82 317CAP4.2 37.26,142.98 37.57,142.98 38.86,144.27 45.64,144.27 46.94,142.98 317CAP3.2 47.17,142.82 47.17,138.02 47.32,137.87 R5.2 47.55,137.72 48.46,137.72 50.52,135.66 | 29.98,131.81 31.7,130.1 34.37,130.1 35.89,128.57 36.27,128.57 ADC_CAP7.2 | 29.98,131.81 27.96,129.79 27.96,124.08 ADC6.9 | 52.5,128.19 52.05,128.65 ADC_CAP8.2 50.52,128.8 50.52,135.66 | ADC7.9 41.91,124.61 v45.41,128.12 | v52.43,128.12 52.5,128.19 | 6.1,137.26 12.65,137.26 17.75,142.37 29.95,142.37 30.06,142.25 | 50.52,135.66 50.67,135.74 55.63,135.74 56.01,136.12 59.59,136.12 60.27,135.43 60.27,134.59 U$5.4
  Bottom 0.406: v64.62,102.36 64.62,93.6 53.49,82.47 37.34,82.47 35.59,84.23 35.59,84.45 SV4.3 | v15.93,133.07 v11.51,128.65 | v52.43,128.12 v45.41,128.12
  other vias: 73.15,134.87
  pour Bottom: 1.52,116.33 1.52,153.42 74.68,153.42 74.68,80.26 64.01,80.26 64.01,116.33
  pour Top: 1.52,116.33 1.52,153.42 74.68,153.42 74.68,80.26 64.01,80.26 64.01,116.33
GND2
  pour Top: 153.67,153.67 153.67,80.01 80.01,80.01 80.01,153.67
  pour Bottom: 153.67,153.67 153.67,80.01 80.01,80.01 80.01,153.67
GND3
  pour Top: 153.67,74.93 153.67,1.27 80.01,1.27 80.01,74.93
  pour Bottom: 153.67,74.93 153.67,1.27 80.01,1.27 80.01,74.93
GND4  (via drill 0.61)
  other vias: 163.83,134.62 170.18,138.43 175.26,132.08 182.88,137.79 196.85,138.43 190.5,127 205.74,139.7 205.74,146.05 182.88,146.05 205.74,133.35 218.44,138.43
  pour Top: 158.75,153.67 232.41,153.67 232.41,80.01 158.75,80.01
  pour Bottom: 158.75,153.67 232.41,153.67 232.41,80.01 158.75,80.01
GND5  (via drill 0.61)
  other vias: 163.83,55.88 170.18,59.69 175.26,53.34 182.88,59.05 196.85,59.69 190.5,48.26 205.74,60.96 205.74,67.31 182.88,67.31 205.74,54.61 218.44,59.69
  pour Top: 158.75,74.93 232.41,74.93 232.41,1.27 158.75,1.27
  pour Bottom: 158.75,74.93 232.41,74.93 232.41,1.27 158.75,1.27
IN1  (via drill 0.61)
  Top 0.406: LMC6484_1.3 8.91,27.43 8.91,26.67 17.75,17.83 SV1.1 | v17.83,22.1 18.67,22.1 22.17,25.6 22.17,27.2 U$6.1
  Bottom 0.406: v17.83,22.1 16.54,20.8 16.54,19.05 17.75,17.83 SV1.1
IN2
  Top 0.406: LMC6484_1.5 11.43,26.67 SV1.2 17.91,20.34 23.47,25.91 23.47,27.2 U$6.2
IN3  (via drill 0.61)
  Top 0.406: U$6.3 24.77,28.04 24,28.8 21.72,28.8 20.95,28.04 v20.95,25.76 20.8,26.21 v17.22,26.21 | LMC6484_1.10 11.43,34.52 v11.73,34.82
  Bottom 0.406: v20.95,25.76 20.95,21.41 21.57,20.8 21.57,19.05 20.34,17.83 SV1.3 | v11.73,34.82 11.73,31.7 v17.22,26.21
IN4
  Top 0.406: SV1.4 20.34,20.34 20.34,20.73 25.98,26.36 25.98,27.2 U$6.4 25.98,27.43 25.98,28.12 24.61,29.49 16.15,29.49 15.85,29.79 10.97,29.79 8.91,31.85 8.91,32.69 LMC6484_1.12
IN5  (via drill 0.61)
  Top 0.406: v17.45,32.69 16.23,32.69 10.21,38.71 10.21,40.01 ADC1.5 | v26.06,25.07 27.28,26.29 27.28,27.2 U$6.5
  Bottom 0.406: v17.45,32.69 17.45,32.31 23.39,26.36 23.39,25.07 | 23.39,25.07 23.39,21.57 24.08,20.88 24.08,19.05 22.86,17.83 SV1.5 | 23.39,25.07 v26.06,25.07
IN6  (via drill 0.61)
  Top 0.406: SV1.6 22.86,20.34 28.57,26.06 U$6.6 28.5,27.43 28.5,28.12 v27.2,29.41 | ADC1.6 11.43,38.48 14.33,35.59 v18.06,35.59
  Bottom 0.406: v18.06,35.59 19.13,35.59 25.3,29.41 v27.2,29.41
IN7  (via drill 0.61)
  Top 0.406: SV1.7 26.67,19.05 26.67,22.17 29.79,25.3 29.79,27.2 U$6.7 | v14.71,36.58 12.72,38.56 12.72,40.01 ADC1.7
  Bottom 0.406: v14.71,36.58 14.71,30.1 18.21,26.59 18.21,23.85 15.85,21.49 15.85,17.98 17.3,16.54 24.16,16.54 SV1.7
IN8  (via drill 0.61)
  Top 0.406: v29.49,21.87 32.46,24.84 32.46,29.79 31.17,31.09 31.17,32.38 U$6.9 | v16.08,40.01 14.02,40.01 ADC1.8 | v20.88,32.46 v20.88,35.2
  Bottom 0.406: v29.49,21.87 29.49,21.11 29.18,20.8 29.18,19.81 28.42,19.05 26.67,19.05 SV1.8 25.45,20.5 27.74,22.78 27.74,25.76 21.03,32.46 v20.88,32.46 | v20.88,35.2 v16.08,40.01
IN9  (via drill 0.61)
  Top 0.406: v19.05,32.92 ADC2.1 | v24.38,23.39 24.16,23.39 21.64,20.88 21.64,17.22 22.33,16.54 26.67,16.54 27.89,17.75 SV1.9 | v31.47,29.41 29.87,31.01 29.87,32.38 U$6.10
  Bottom 0.406: v19.05,32.92 25.91,26.06 26.44,26.06 27.05,25.45 27.05,24.69 25.76,23.39 v24.38,23.39 | v31.47,29.41 31.47,21.11 31.7,20.88 31.7,19.81 30.94,19.05 29.41,19.05 28.19,17.83 27.96,17.83 SV1.9
IN10  (via drill 0.61)
  Top 0.406: U$6.11 v28.57,34.59 v28.57,37.87 | v21.57,42.29 20.34,41.07 20.34,40.08 ADC2.2
  Bottom 0.406: v28.57,34.59 28.57,22.33 27.96,21.72 27.96,20.34 SV1.10 | v21.57,42.29 22.48,43.2 23.24,43.2 v28.57,37.87
IN11  (via drill 0.61)
  Top 0.406: v22.86,42.22 21.64,41 21.64,40.08 ADC2.3 | v27.28,37.8 27.28,32.46 U$6.12
  Bottom 0.406: v22.86,42.22 v27.28,37.8 27.36,37.64 28.12,36.88 28.96,36.88 29.57,37.49 29.57,38.25 22.94,44.88 6.78,44.88 4.5,42.6 4.5,36.35 9.6,31.24 9.6,23.24 16.99,15.85 27.74,15.85 29.64,17.75 30.48,17.75 SV1.11
IN12  (via drill 0.61)
  Top 0.406: v26.29,34.67 26.06,34.44 26.06,32.46 U$6.13 | v22.86,36.88 ADC2.4
  Bottom 0.406: SV1.12 30.48,34.06 28.96,35.59 28.19,35.59 27.28,34.67 v26.29,34.67 26.14,34.75 23.62,34.75 22.78,35.59 22.78,36.35 22.86,36.42 v22.86,36.88
IN13  (via drill 0.61)
  Top 0.406: U$6.14 24.77,36.8 24.16,37.41 24.16,40.01 ADC2.5 24.23,40.23 24.23,41 25.6,42.37 28.12,42.37 30.25,44.5 30.25,48.39 v31.55,49.68 | v30.56,55.32 30.56,53.87 v32.08,52.35
  Bottom 0.406: v30.56,55.32 14.1,55.32 3.81,45.03 3.81,36.04 8.91,30.94 8.91,22.94 16.99,14.86 30.33,14.86 32.99,17.53 32.99,17.75 SV1.13 | v32.08,52.35 32.08,50.22 v31.55,49.68
IN14  (via drill 0.61)
  Top 0.406: v23.77,35.97 23.55,35.74 23.55,32.46 U$6.15 | v25.38,37.57 25.38,40.01 ADC2.6 | v29.11,15.85 20.5,15.85 19.05,17.3 v19.05,19.05 | v16.46,38.25 16.46,39.01 18.29,40.84 18.29,41.38 19.13,42.22 v19.58,42.22
  Bottom 0.406: v25.38,37.57 24.8,36.99 | 24.8,36.99 v23.77,35.97 | v29.11,15.85 30.33,15.85 31.7,17.22 31.7,18.21 32.99,19.51 32.99,20.27 SV1.14 | v19.05,19.05 19.05,29.72 16.46,32.31 v16.46,38.25 | 24.8,36.99 v19.58,42.22
IN15  (via drill 0.61)
  Top 0.406: SV1.15 34.29,19.05 34.29,20.8 36.2,22.71 U$7.1 36.12,27.43 35.59,27.96 v35.59,29.34 | ADC2.7 26.67,40.92 27.43,41.68 v29.64,41.68
  Bottom 0.406: v29.64,41.68 35.59,35.74 v35.59,29.34
IN16  (via drill 0.61)
  Top 0.406: U$7.2 37.41,27.2 37.41,22.4 35.59,20.57 35.59,20.34 SV1.16 | v32,35.97 27.96,40.01 ADC2.8
  Bottom 0.406: v32,35.97 32,30.25 32.92,29.34 32.92,22.94 35.51,20.34 SV1.16
IN17  (via drill 0.61)
  Top 0.406: v32.99,36.96 32.99,40.01 ADC3.1 | U$7.3 38.71,27.2 38.71,22.71 36.88,20.88 36.88,19.05 38.1,17.83 SV1.17
  Bottom 0.406: v32.99,36.96 32.99,30.25 33.6,29.64 33.6,23.62 35.66,21.57 36.04,21.57 36.88,20.73 36.88,19.05 38.1,17.83 SV1.17
IN18  (via drill 0.61)
  Top 0.406: ADC3.2 34.29,36.88 33.6,36.2 33.6,24.99 v35.2,23.39 | U$7.4 40.01,22.25 38.1,20.34 SV1.18
  Bottom 0.406: v35.2,23.39 38.1,20.5 SV1.18
IN19  (via drill 0.61)
  Top 0.406: v41.3,22.33 41.3,27.2 U$7.5 | v45.87,50.67 46.41,50.14 46.41,49 45.11,47.7 45.11,46.41 40.84,42.14 36.8,42.14 35.59,40.92 35.59,40.08 ADC3.3
  Bottom 0.406: v41.3,22.33 41.3,21.41 41.91,20.8 41.91,19.05 SV1.19 41.15,18.06 43.36,15.85 58.22,15.85 59.66,17.3 59.66,21.95 58.52,23.09 58.52,30.4 58.22,30.71 58.22,49.23 56.77,50.67 v45.87,50.67
IN20  (via drill 0.61)
  Top 0.406: U$7.6 42.52,27.2 42.52,22.17 40.69,20.34 SV1.20 | v34.59,34.29 36.8,36.5 36.8,40.01 ADC3.4
  Bottom 0.406: v34.59,34.29 34.59,26.36 SV1.20
IN21
  Top 0.406: SV1.21 43.2,17.83 44.42,19.05 44.42,20.8 43.81,21.41 U$7.7 43.74,27.43 43.74,28.12 43.05,28.8 37.72,28.8 35.43,31.09 35.43,33.76 38.1,36.42 ADC3.5
IN22  (via drill 0.61)
  Top 0.406: v41.45,36.58 39.4,38.63 39.4,40.01 ADC3.6 | v44.88,34.75 44.88,32.61 45.03,32.46 U$7.9
  Bottom 0.406: v44.88,34.75 43.05,36.58 v41.45,36.58 41.3,36.5 38.25,36.5 36.73,34.98 36.73,28.35 43.13,21.95 43.13,20.34 SV1.22
IN23  (via drill 0.61)
  Top 0.406: U$7.10 43.81,40.23 42.48,41.57 | 42.48,41.57 42.37,41.68 41.45,41.68 40.69,40.92 40.69,40.08 ADC3.7 | SV1.23 45.72,17.6 v49.99,13.34 | v55.85,37.34 v60.5,32.69 | 42.48,41.57 v45.03,44.12
  Bottom 0.406: v49.99,13.34 57.68,13.34 61.04,16.69 61.04,32.16 v60.5,32.69 | v55.85,37.34 55.85,38.33 51.82,42.37 51.82,42.82 50.52,44.12 v45.03,44.12
IN24  (via drill 0.61)
  Top 0.406: 42.52,35.59 42.52,39.4 41.91,40.01 ADC3.8 | 42.52,35.59 42.52,32.46 U$7.11 | v39.93,34.59 40.92,35.59 42.52,35.59
  Bottom 0.406: SV1.24 45.72,28.8 v39.93,34.59
IN25  (via drill 0.61)
  Top 0.406: v41.3,34.59 41.3,32.46 U$7.12 | v46.94,35.43 46.94,40.01 ADC4.1 | v47.02,26.29 47.02,19.81 48.23,18.59 48.23,17.83 SV1.25
  Bottom 0.406: v41.3,34.59 42.44,34.59 43.36,33.68 45.19,33.68 v46.94,35.43 47.02,35.28 v47.02,26.29
IN26  (via drill 0.61)
  Top 0.406: U$7.13 40.01,31.62 40.77,30.86 45.57,30.86 47.43,32.73 | 47.43,32.73 48.23,33.53 48.23,40.01 ADC4.2 | 47.43,32.73 v48.23,31.93
  Bottom 0.406: v48.23,31.93 48.23,20.34 SV1.26
IN27  (via drill 0.61)
  Top 0.406: v39.09,37.57 38.79,37.26 38.79,32.46 U$7.14 | v45.03,41.68 48.77,41.68 49.53,40.92 ADC4.3 | v55.63,28.12 55.17,28.12 52.96,30.33 v50.6,30.33
  Bottom 0.406: v39.09,37.57 40.92,37.57 43.55,40.2 | v45.03,41.68 43.55,40.2 | v55.63,28.12 55.63,24 57.15,22.48 57.15,17.3 56.39,16.54 52.81,16.54 51.59,17.75 50.83,17.75 SV1.27 | v50.6,30.33 50.6,33.15 43.55,40.2
IN28  (via drill 0.61)
  Top 0.406: v37.72,34.59 37.49,34.37 37.49,32.46 U$7.15 | v54.71,42.22 53.72,43.2 52.96,43.2 50.83,41.07 50.83,40.08 ADC4.4 | SV1.28 v52.35,21.87
  Bottom 0.406: v37.72,34.59 37.72,28.35 44.5,21.57 44.5,19.81 45.26,19.05 49.53,19.05 SV1.28 | v54.71,42.22 54.71,41.45 57.53,38.63 57.53,31.39 54.25,28.12 54.25,23.77 v52.35,21.87
IN29  (via drill 0.61)
  Top 0.406: U$8.1 50.14,27.2 50.14,21.41 49.53,20.8 49.53,19.81 50.29,19.05 52.12,19.05 53.34,17.83 SV1.29 | v51.59,34.59 52.05,35.05 52.05,40.01 ADC4.5
  Bottom 0.406: v51.59,34.59 51.59,22.48 51.36,22.25 51.36,21.49 52.12,20.73 52.12,19.05 53.34,17.83 SV1.29
IN30  (via drill 0.61)
  Top 0.406: U$8.2 51.44,24.16 52.35,23.24 | 52.35,23.24 53.34,22.25 SV1.30 | v53.34,42.22 ADC4.6 | 52.35,23.24 v52.58,23.47
  Bottom 0.406: v53.34,42.22 53.34,41.83 56.84,38.33 56.84,31.7 53.57,28.42 53.57,24.46 v52.58,23.47
IN31  (via drill 0.61)
  Top 0.406: 52.73,25.07 52.73,24.69 v54.63,22.78 | 52.73,25.07 52.73,27.2 U$8.3 | v52.96,34.59 52.96,36.8 54.56,38.41 54.56,40.01 ADC4.7 | v52.58,25.07 52.73,25.07
  Bottom 0.406: v54.63,22.78 54.63,19.05 55.85,17.83 SV1.31 | v52.96,34.59 52.96,28.73 52.58,28.35 v52.58,25.07
IN32  (via drill 0.61)
  Top 0.406: U$8.5 54.03,32.46 54.03,36.88 55.85,38.71 55.85,40.01 ADC4.8 56.01,40.16 v57.23,41.38 | v56.54,49.53 56.54,55.78 U$2.1
  Bottom 0.406: v56.54,49.53 56.54,48.16 57.23,47.47 v57.23,41.38
IN33  (via drill 0.61)
  Top 0.406: LMC6484_2.3 8.91,106.17 8.91,105.41 17.75,96.57 SV3.1 | v17.83,100.84 18.67,100.84 22.17,104.34 22.17,105.94 U$1.1
  Bottom 0.406: v17.83,100.84 16.54,99.54 16.54,97.79 17.75,96.57 SV3.1
IN34
  Top 0.406: LMC6484_2.5 11.43,105.41 SV3.2 17.91,99.08 23.47,104.65 23.47,105.94 U$1.2
IN35  (via drill 0.61)
  Top 0.406: U$1.3 24.77,106.78 24,107.54 21.72,107.54 20.95,106.78 v20.95,104.5 20.8,104.95 v17.22,104.95 | LMC6484_2.10 11.43,113.26 v11.73,113.56
  Bottom 0.406: v20.95,104.5 20.95,100.15 21.57,99.54 21.57,97.79 20.34,96.57 SV3.3 | v11.73,113.56 11.73,110.44 v17.22,104.95
IN36
  Top 0.406: SV3.4 20.34,99.08 20.34,99.47 25.98,105.11 25.98,105.94 U$1.4 25.98,106.17 25.98,106.86 24.61,108.23 16.15,108.23 15.85,108.53 10.97,108.53 8.91,110.59 8.91,111.43 LMC6484_2.12
IN37  (via drill 0.61)
  Top 0.406: v29.49,100.61 32.46,103.58 32.46,108.53 31.17,109.83 31.17,111.12 U$1.9 | v16.08,118.75 14.02,118.75 ADC5.8 | v20.88,111.2 v20.88,113.94
  Bottom 0.406: v29.49,100.61 29.49,99.85 29.18,99.54 29.18,98.55 28.42,97.79 26.67,97.79 SV3.8 25.45,99.24 27.74,101.52 27.74,104.5 21.03,111.2 v20.88,111.2 | v20.88,113.94 v16.08,118.75
IN38  (via drill 0.61)
  Top 0.406: SV3.7 26.67,97.79 26.67,100.91 29.79,104.04 29.79,105.94 U$1.7 | v14.71,115.32 12.72,117.3 12.72,118.75 ADC5.7
  Bottom 0.406: v14.71,115.32 14.71,108.84 18.21,105.33 18.21,102.59 15.85,100.23 15.85,96.72 17.3,95.28 24.16,95.28 SV3.7
IN39  (via drill 0.61)
  Top 0.406: SV3.6 22.86,99.08 28.57,104.8 U$1.6 28.5,106.17 28.5,106.86 v27.2,108.15 | ADC5.6 11.43,117.22 14.33,114.33 v18.06,114.33
  Bottom 0.406: v18.06,114.33 19.13,114.33 25.3,108.15 v27.2,108.15
IN40  (via drill 0.61)
  Top 0.406: v17.45,111.43 16.23,111.43 10.21,117.45 10.21,118.75 ADC5.5 | v26.06,103.81 27.28,105.03 27.28,105.94 U$1.5
  Bottom 0.406: v17.45,111.43 17.45,111.05 23.39,105.11 23.39,103.81 | 23.39,103.81 23.39,100.31 24.08,99.62 24.08,97.79 22.86,96.57 SV3.5 | 23.39,103.81 v26.06,103.81
IN41  (via drill 0.61)
  Top 0.406: U$1.11 v28.57,113.33 v28.57,116.61 | v21.57,121.03 20.34,119.81 20.34,118.82 ADC6.2
  Bottom 0.406: v28.57,113.33 28.57,101.07 27.96,100.46 27.96,99.08 SV3.10 | v21.57,121.03 22.48,121.94 23.24,121.94 v28.57,116.61
IN42  (via drill 0.61)
  Top 0.406: v19.05,111.66 ADC6.1 | v24.38,102.13 24.16,102.13 21.64,99.62 21.64,95.96 22.33,95.28 26.67,95.28 27.89,96.5 SV3.9 | v31.47,108.15 29.87,109.75 29.87,111.12 U$1.10
  Bottom 0.406: v19.05,111.66 25.91,104.8 26.44,104.8 27.05,104.19 27.05,103.43 25.76,102.13 v24.38,102.13 | v31.47,108.15 31.47,99.85 31.7,99.62 31.7,98.55 30.94,97.79 29.41,97.79 28.19,96.57 27.96,96.57 SV3.9
IN43  (via drill 0.61)
  Top 0.406: U$1.14 24.77,115.55 24.16,116.15 24.16,118.75 ADC6.5 24.23,118.97 24.23,119.74 25.6,121.11 28.12,121.11 30.25,123.24 30.25,127.13 v31.55,128.42 | v30.56,134.06 30.56,132.61 v32.08,131.09